# Altium PCB EVB_gate driver.PcbDoc
Units mm, origin at the board's own origin, x right, y up, seen from the top; angles counter-clockwise.
Board outline 29.97 x 33.27 mm, 2 copper layers (TOP Assembly Layer, Bottom Layer), stack 0.142 mm thick; 26 components, 19 nets, 81 pads, 7 vias.
Unrouted connection lines stored in the file: 1.
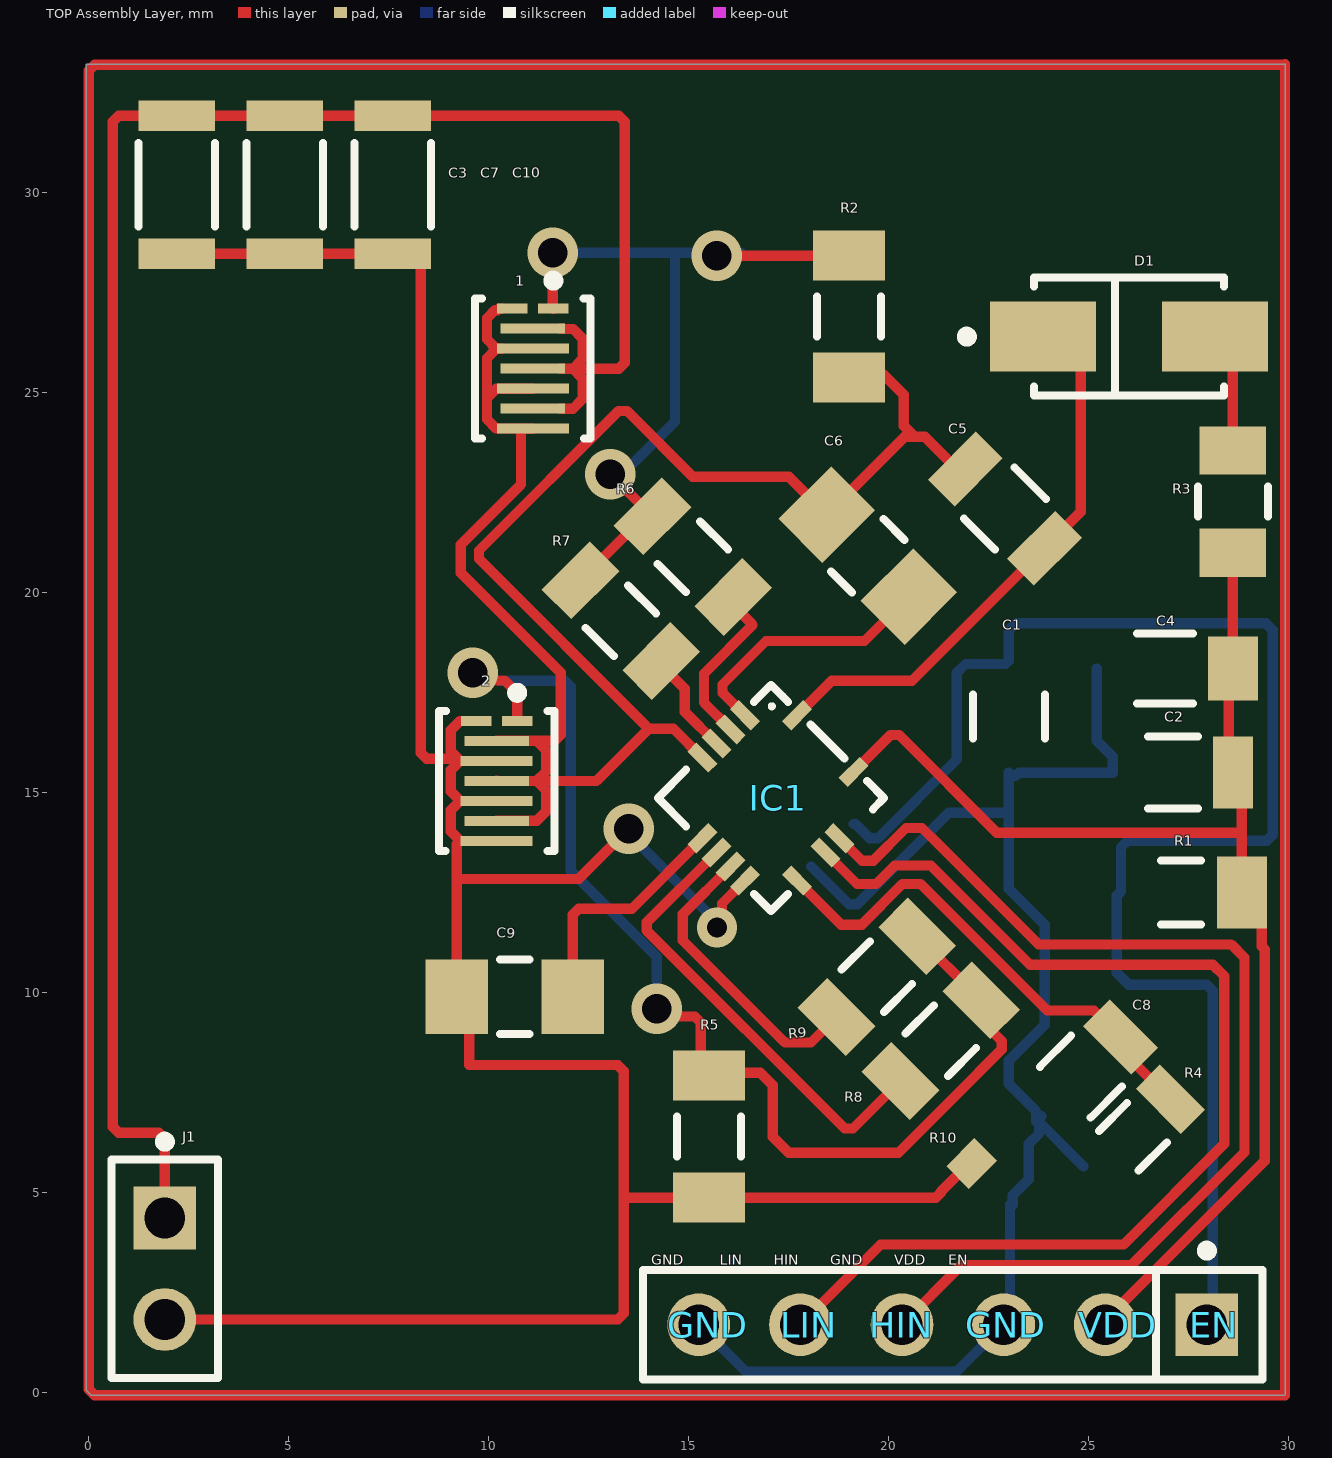
[diagram p0: TOP Assembly Layer view]
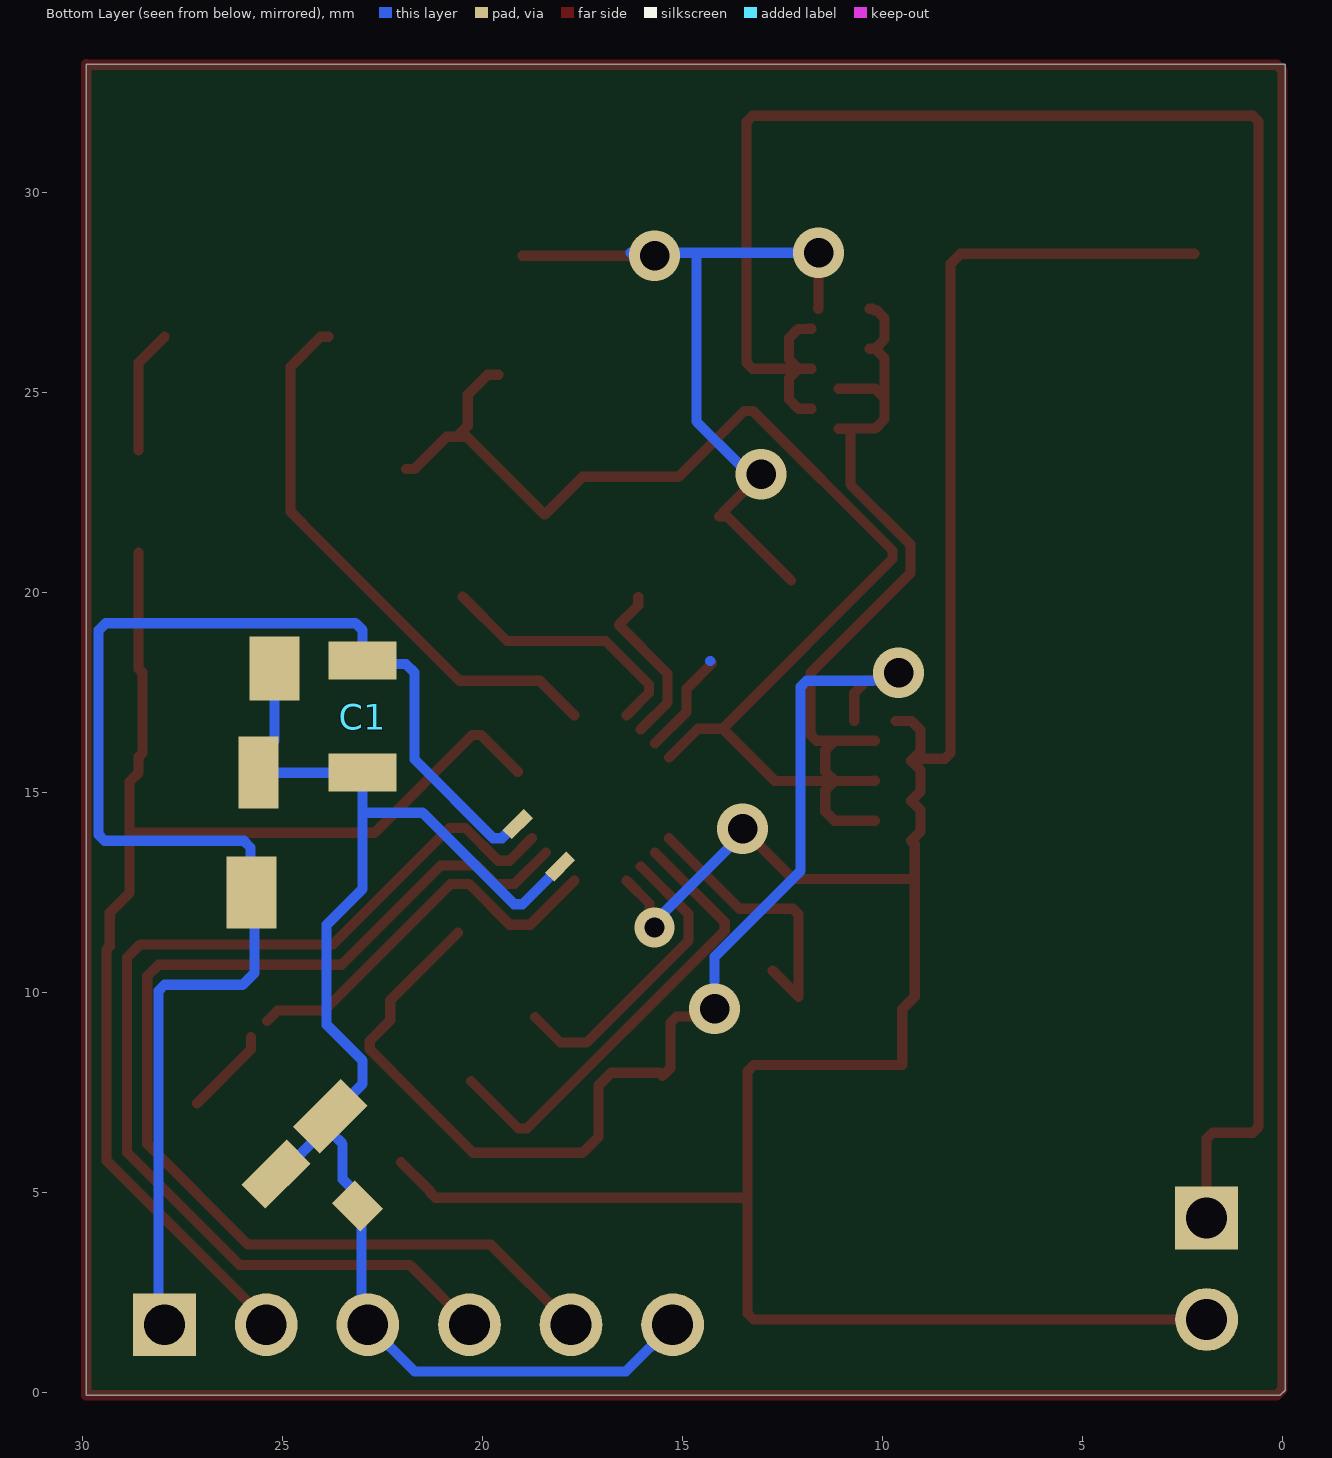
[diagram p1: Bottom Layer view, seen from below]
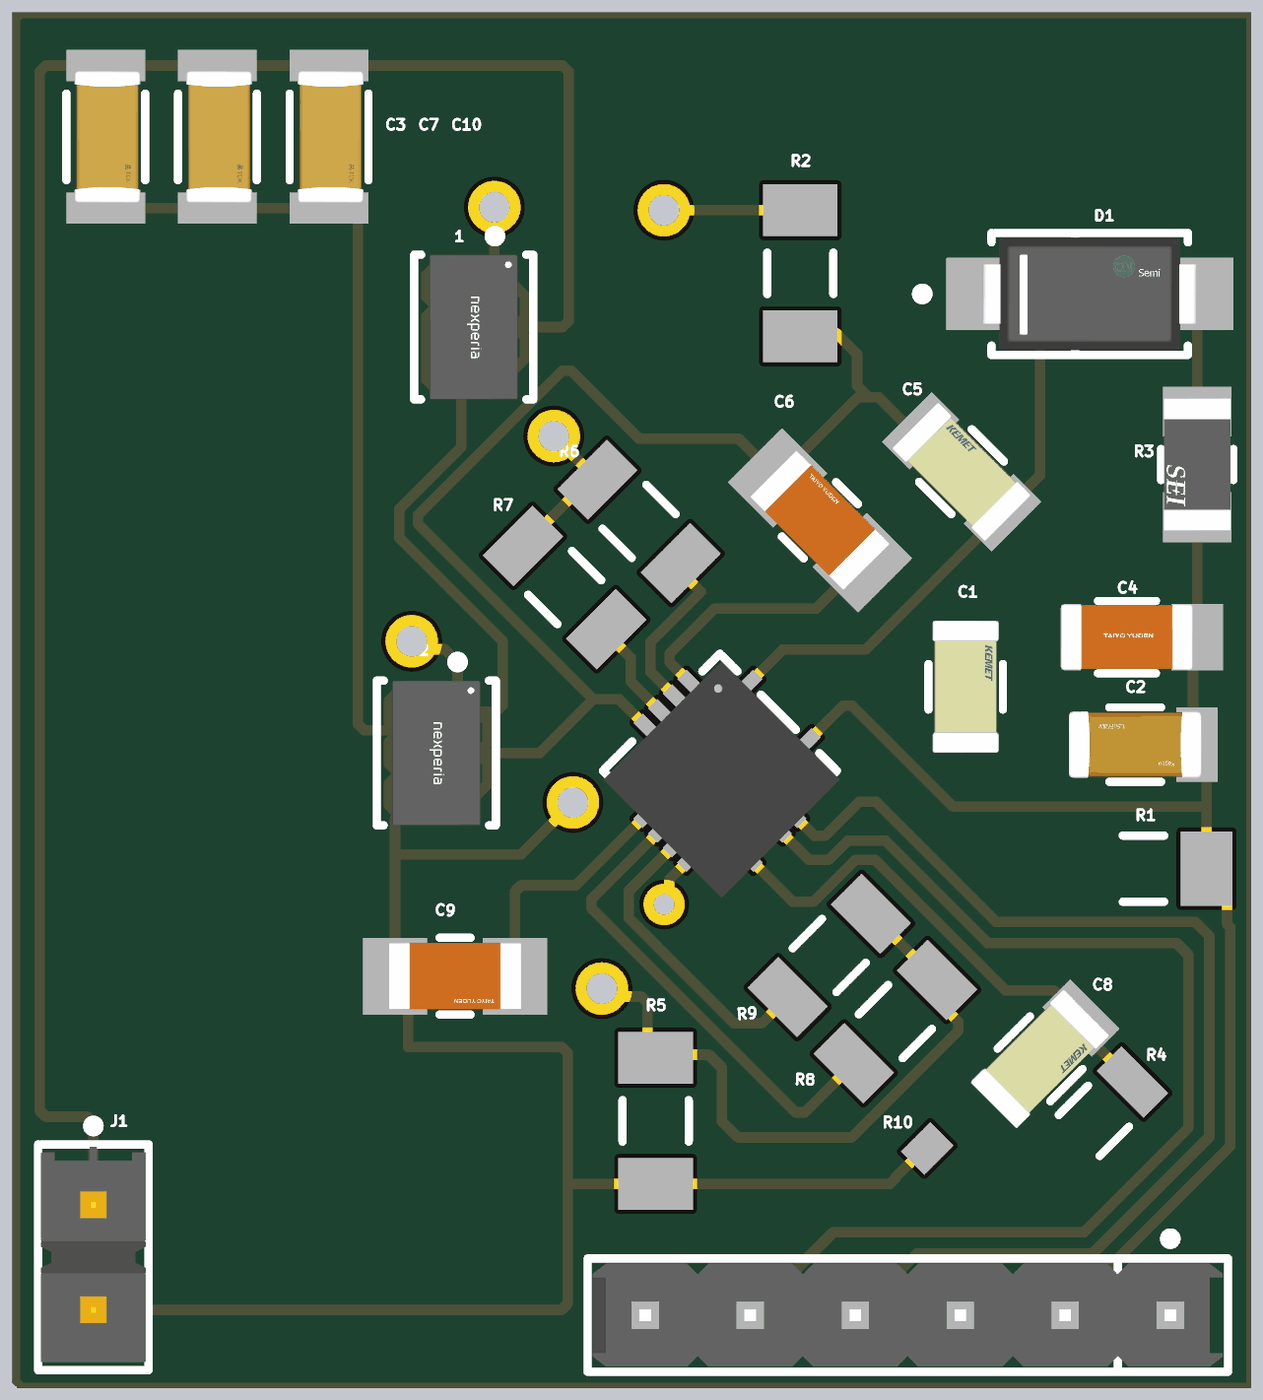
[diagram p2: 3D render of the assembled board from above, using the file's embedded part models]

## Layer stack, top to bottom
Top Solder: solder mask 0.0102, Solder Resist, Dk 3.5
TOP Assembly Layer: signal copper 0.0356
Dielectric 2: prepreg 0.0711, PP-006, Dk 4.29
Bottom Layer: signal copper 0.0356
Bottom Solder: solder mask 0.0102, Solder Resist, Dk 3.5

## Board outline
29.909,-0.064 29.909,33.21 -0.064,33.21 -0.064,0.064 0.064,-0.064

## Design rules (kind name [scope] priority, off if disabled: settings)
Clearance [All] p1: gap=0.21 ignorepadtopadclearanceinfootprint=TRUE
PolygonConnect [All] p1: connectstyle=Relief reliefconductorwidth=0.254 reliefentries=4 polygonreliefangle="90 Angle" airgapwidth=0.254
RoutingVias [All] p1: holewidth=0.74 width=1.27 viastyle="Through Hole" minholewidth=0.74 minwidth=1.27 maxholewidth=0.74 maxwidth=1.27
SolderMaskExpansion [All] p1: expansion=0.102 istentingtop=FALSE
SupplyNets "Schematic Supply Nets" [InNet('GND')] p1: voltage=0.000
UnRoutedNet [All] p1: checkbadconnections=TRUE
Width [All] p1: maxlimit=0.254 minlimit=0.254 preferedwidth=0.254
29 further rules are at their usual default settings.

## Components (designator, comment, footprint, x,y, rotation, side; value= is the part's Value field where it differs from the comment)
1 "GAN3R2-100CBE" FP-WLCSP8-SOT8072-MFG 11.1,25.6 r270 top
2 "GAN3R2-100CBE" FP-WLCSP8-SOT8072-MFG 10.196,15.298 r270 top
C1 "10PF" FP-C1206C-EB-MFG#1 23,16.9 r270 top value="10 pF"
C2 "1uF" FP-CC1206-1_25-MFG 27.1,15.5 r180 top value="1 uF"
C3 "50u" FP-CGA5L-0_3-0_1-IPC_B 4.9,30.2 r270 top
C4 "100nF" FP-1206-L_3_2_0_15-W_1_6-MFG 26.9,18.1 r0 top
C5 "470uF" FP-C1206C-EB-MFG#2 22.9,22.1 r315 top value="0.47 μF"
C6 "1uF" FP-1206-L_3_2_0_15-W_1_6-IPC_A 19.474,20.926 r315 top
C7 "100uF" FP-CGA5L-0_3-0_1-IPC_B 2.2,30.2 r270 top
C8 "0.1uF" FP-C1206C-EB-MFG#3 24.8,7.9 r225 top value="0.10 μF"
C9 "1uF" FP-1206-L_3_2_0_15-W_1_6-IPC_A 10.649,9.9 r180 top
C10 "10u" FP-CGA5L-0_3-0_1-IPC_B 7.6,30.2 r270 top
D1 "ES1J" FP-403AE-MFG 26,26.4 r0 top value=10pF
"GND   LIN   HIN   GND   VDD   EN" "GND        LIN       HIN       GND       VDD     EN" FP-22-28-4060-MFG 21.6,1.7 r180 top (schematic designator Connector)
IC1 "NCP51820" NCP51820 17.054,14.868 r315 top
J1 "TSW-102-07-F-S" FP-TSW-102-07-F-S-MFG 1.9,3.1 r270 top
R1 "10K" RESC3116X65X40ML10T20#1 27.3,12.5 r180 top
R2 "10" RESC3116X65X40ML10T20#2 19,26.9 r90 top
R3 "2.0" FP-RMCF1206-IPC_C 28.6,22.276 r270 top
R4 "60.4" RESC3116X65X40LL10T20 26.1,6.4 r225 top
R5 "10" RESC3116X65X40ML10T20#2 15.5,6.4 r90 top
R6 "10" RESC3116X65X40NL10T20 15.1,20.9 r315 top
R7 "2.0" RESC3116X65X40NL10T20 13.3,19.3 r315 top
R8 "10" RESC3116X65X40NL10T20 21.3,8.8 r225 top
R9 "2.0" RESC3116X65X40NL10T20 19.7,10.4 r225 top
R10 "0" RESC1608X55X25ML10T15 22.6,5.2 r315 top

## Footprints (in the part's own frame and the unit in brackets; to place one, negate y for a bottom-side part, rotate by r counter-clockwise, add the part's x,y. Pads: shape width x height; smd on the part's side, far side on the other; paste and mask are expansions set on the pad)
FP-22-28-4060-MFG [mm]
  rect 1.57x1.57 hole 1.02 paste-2539.97 mask+0: 1(-6.35,0)
  round 1.57 hole 1.02 paste-2539.97 mask+0: 2(-3.81,0) 3(-1.27,0) 4(1.27,0) 5(3.81,0) 6(6.35,0)
  silkscreen extent -7.75,-1.97 7.75,1.37, body extent -7.85,-1.47 7.85,1.47, height 0.25
FP-403AE-MFG [mm]
  rect 2.65x1.75 smd paste+0 mask+0: 1(-2.15,0) 2(2.15,0)
  silkscreen extent -4.17,-1.48 2.37,1.48, body extent -3.57,-1.58 3.57,1.58, height 0.25
FP-1206-L_3_2_0_15-W_1_6-IPC_A [mm]
  rect 1.555x1.858 smd paste+0 mask+0: 1(-1.451,0) 2(1.451,0)
  silkscreen extent -0.37,-0.93 0.37,0.93, body extent -2.73,-1.43 2.73,1.43, height 0.25
FP-1206-L_3_2_0_15-W_1_6-MFG [mm]
  rect 1.25x1.6 smd far side paste+0 mask+0: 1(-1.7,0)
  rect 1.25x1.6 smd paste+0 mask+0: 2(1.7,0)
  silkscreen extent -0.7,-0.87 0.7,0.87, body extent -2.42,-0.97 2.42,0.97, height 0.25
FP-C1206C-EB-MFG#1 [mm]
  rect 0.95x1.7 smd far side paste+0 mask+0: 1(-1.4,0) 2(1.4,0)
  silkscreen extent -0.55,-0.9 0.55,0.9, body extent -2,-1 2,1, height 0.25
FP-C1206C-EB-MFG#2 [mm]
  rect 0.95x1.7 smd paste+0 mask+0: 1(-1.4,0) 2(1.4,0)
  silkscreen extent -0.55,-0.9 0.55,0.9, body extent -2,-1 2,1, height 0.25
FP-C1206C-EB-MFG#3 [mm]
  rect 0.95x1.7 smd paste+0 mask+0: 1(-1.4,0)
  rect 0.95x1.7 smd far side paste+0 mask+0: 2(1.4,0)
  silkscreen extent -0.55,-0.9 0.55,0.9, body extent -2,-1 2,1, height 0.25
FP-CC1206-1_25-MFG [mm]
  rect 1x1.8 smd paste+0 mask+0: 1(-1.5,0)
  rect 1x1.8 smd far side paste+0 mask+0: 2(1.5,0)
  silkscreen extent -0.63,-0.9 0.63,0.9, body extent -2.2,-1.25 2.2,1.25, height 0.25
FP-CGA5L-0_3-0_1-IPC_B [mm]
  rect 0.756x1.906 smd paste+0 mask+0: 1(-1.725,0) 2(1.725,0)
  silkscreen extent -1.05,-0.95 1.05,0.95, body extent -2.35,-1.2 2.35,1.2, height 0.25
FP-RMCF1206-IPC_C [mm]
  rect 1.204x1.658 smd paste+0 mask+0: 1(-1.276,0) 2(1.276,0)
  silkscreen extent -0.37,-0.87 0.37,0.87, body extent -1.98,-0.97 1.98,0.97, height 0.25
FP-TSW-102-07-F-S-MFG [mm]
  rect 1.57x1.57 hole 1.02 paste-2539.97 mask+0: 1(-1.27,0)
  round 1.57 hole 1.02 paste-2539.97 mask+0: 2(1.27,0)
  silkscreen extent -3.3,-1.34 2.73,1.34, body extent -2.83,-1.44 2.83,1.44, height 0.25
FP-WLCSP8-SOT8072-MFG [mm]
  rect 0.25x0.77 smd paste-1000 mask+0: 1(-1.5,0.512) 2(-1.5,-0.513)
  rect 0.25x1.62 smd paste-1000 mask+0: 3(-1,0) 5(0,0) 7(1,0)
  rect 0.25x1.8 smd paste-1000 mask+0: 4(-0.5,0) 6(0.5,0) 8(1.5,0)
  silkscreen extent -2.32,-1.44 1.75,1.44, body extent -1.85,-1.17 1.85,1.17, height 0.25
NCP51820 [mm]
  rect 0.75x0.32 smd: 1(-1.925,1) 2(-1.925,0.5) 3(-1.925,0) 4(-1.925,-0.5) 9(1.925,-1) 11(1.925,0) 12(1.925,0.5)
  rect 0.32x0.75 smd: 5(-0.5,-1.925) 6(0,-1.925) 7(0.5,-1.925) 8(1,-1.925) 14(1,1.925) 15(-1,1.925)
  rect 0.75x0.32 smd far side: 10(1.925,-0.5) 13(1.925,1)
  silkscreen extent -2,-2 2,2, body extent -1.84,-2.14 2.2,1.9, height 0.89
RESC1608X55X25ML10T15 [mm] "Chip Resistor, 2-Leads, Body 1.60x0.80mm, IPC Low Density"
  rect 0.8x1 smd: 1(-0.75,0)
  rect 0.8x1 smd far side: 2(0.75,0)
  body extent -0.85,-0.45 0.85,0.45, height 0.55
RESC3116X65X40LL10T20 [mm] "Chip Resistor, 2-Leads, Body 3.10x1.60mm, IPC High Density"
  rect 0.85x1.6 smd: 1(-1.325,0)
  rect 0.85x1.6 smd far side: 2(1.325,0)
  silkscreen extent -0.5,-0.7 0.5,0.7, body extent -1.6,-0.85 1.6,0.85, height 0.65
RESC3116X65X40ML10T20#1 [mm] "Chip Resistor, 2-Leads, Body 3.10x1.60mm, IPC Low Density"
  rect 1.25x1.8 smd: 1(-1.525,0)
  rect 1.25x1.8 smd far side: 2(1.525,0)
  silkscreen extent -0.5,-0.8 0.5,0.8, body extent -1.6,-0.85 1.6,0.85, height 0.65
RESC3116X65X40ML10T20#2 [mm] "Chip Resistor, 2-Leads, Body 3.10x1.60mm, IPC Low Density"
  rect 1.25x1.8 smd: 1(-1.525,0) 2(1.525,0)
  silkscreen extent -0.5,-0.8 0.5,0.8, body extent -1.6,-0.85 1.6,0.85, height 0.65
RESC3116X65X40NL10T20 [mm] "Chip Resistor, 2-Leads, Body 3.10x1.60mm, IPC Medium Density"
  rect 1.05x1.7 smd: 1(-1.425,0) 2(1.425,0)
  silkscreen extent -0.5,-0.75 0.5,0.75, body extent -1.6,-0.85 1.6,0.85, height 0.65

## Part data
1 2: library part GAN3R2-100CBE_1, "GAN3R2-100CBE                                                                                                                                                                                                                                                     100 V, 3.2 mOhm Gallium Nitride (GaN) FET in a 3.5 mm x 2.13 mm Wafer Level Chip", Continuous Drain Current (ID)=60A, Drain to Source Breakdown Voltage=100V, Drain to Source Resistance=2.4mΩ, Gate to Source Voltage (Vgs)=-4V, Max Junction Temperature (Tj)=150°C, Min Operating Temperature=-40°C, Power Dissipation=394W, Drain to Source Voltage (Vdss)=100V, Height=464µm, Max Operating Temperature=150°C, MPN=GAN3R2-100CBE, NexarPartId=136220986, Number of Channels=1
C1: library part CMP-1037-00647-2, "CAP CER 10PF 50V C0G/NP0 1206", Capacitance="10 pF", Manufacturer=KEMET, Manufacturer Part Number=C1206C100J5GACTU, Package=C1206C-EB, Temperature="-55°C to +150°C", Temperature Characteristic=C0G, Temperature Coefficient=15%, Temperature Range High=+150°C, Temperature Range Low=-55°C, Tolerance=0.05, Voltage Rating="50 V", Automotive=Yes, Automotive Grade="Grade 0", Category=Cap, ComponentLink2Description=Datasheet, ComponentLink2URL=https://content.kemet.com/datasheets/KEM_C1007_X8R_ULTRA_150C_SMD.pdf, Device Class L1="Passive Components", Device Class L2=Capacitors, Device Class L3="Ceramic Capacitors", Digikey Description="CAP CER 10PF 50V C0G/NP0 1206", Height=0.88mm, Ipc Land Pattern Name=CAPC320160X78, Lead Free=Yes, Material=Ceramic, Mouser Description="Multilayer Ceramic Capacitors MLCC - SMD/SMT 50volts 10pF C0G 5%", Octopart=https://octopart.com/c1206c100j5gactu-kemet-87062, RoHS=TRUE
C2: library part CMP-1037-04701-3, "CAP CER 1UF 25V X7R 1206", Capacitance="1 uF", Manufacturer=Yageo, Manufacturer Part Number=CC1206KKX7R8BB105, Package=CC1206-1.25, Temperature="-55°C to +125°C", Temperature Characteristic=X7R, Temperature Coefficient=15%, Temperature Range High=+125°C, Temperature Range Low=-55°C, Tolerance=0.1, Voltage Rating="25 V", Automotive=No, Automotive Grade=NA, Category=Cap, ComponentLink2Description=Datasheet, ComponentLink2URL=http://www.yageo.com/documents/recent/UPY-NP0X7R_HV_1KV-to-3KV_11.pdf, Device Class L1="Passive Components", Device Class L2=Capacitors, Device Class L3="Ceramic Capacitors", Digikey Description="CAP CER 1UF 25V X7R 1206", Footprint Url=http://www.yageo.com/exep/pages/download/literatures/UPY-C_GEN_24.pdf, Height=1.45mm, Lead Free=Yes, Material=Ceramic, Mouser Description="Surface Mount Ceramic Multilayer Capacitor 1uF 10% X7R 25V 1206 Blister T/R", Octopart=https://octopart.com/cc1206kkx7r8bb105-yageo-11543785, RoHS=TRUE
C3 C7 C10: library part CMP-08246-001673-1, "Cap Ceramic 100nF 450V X7T 10% Pad SMD 1206 +125°C Automotive T/R", Capacitance=100nF, Case Code (Imperial)=1206, Case Code (Metric)=3216, Dielectric=X7T, Max Operating Temperature=125°C, Min Operating Temperature=-55°C, Package Quantity=1, Ratings=AEC-Q200, Tolerance=10%, Voltage Rating=450V, Case/Package=1206, Depth=1.6mm, Features="Soft Termination", Height=1.6mm, Lead Free="Lead Free", Length=3.2mm, Mount="Surface Mount", Packaging="Tape and Reel", REACH SVHC="No SVHC", Termination=SMD/SMT, Thickness=0.075inch, Voltage Rating (DC)=450V, Weight=0.000571oz, Width=0.063inch
C4: library part CMP-14477-000033-2, "None", RoHS Compliant=Yes
C5: library part CMP-1037-04557-2, "CAP CER 0.47UF 25V X5R 1206", Capacitance="0.47 μF", Manufacturer=KEMET, Manufacturer Part Number=C1206C474K3PACTU, Package=C1206C-EB, Temperature="-55°C to +150°C", Temperature Characteristic=X5R, Temperature Coefficient=15%, Temperature Range High=+150°C, Temperature Range Low=-55°C, Tolerance=0.1, Voltage Rating="25 V", Automotive=Yes, Automotive Grade="Grade 0", Category=Cap, ComponentLink2Description=Datasheet, ComponentLink2URL=https://content.kemet.com/datasheets/KEM_C1007_X8R_ULTRA_150C_SMD.pdf, Device Class L1="Passive Components", Device Class L2=Capacitors, Device Class L3="Ceramic Capacitors", Digikey Description="CAP CER 0.47UF 25V X5R 1206", Height=0.88mm, Ipc Land Pattern Name=CAPC320160X78, Lead Free=Yes, Material=Ceramic, Mouser Description="Multilayer Ceramic Capacitors MLCC - SMD/SMT 25volts 0.47uF X5R 10%", Octopart=https://octopart.com/c1206c474k3pactu-kemet-16430430, RoHS=TRUE
C6 C9: library part CMP-14477-003409-2, "None", Case Code (Imperial)=1206, Case Code (Metric)=3216, Dielectric=X5R, Max Operating Temperature=85°C, Min Operating Temperature=-55°C, Package Quantity=1, Resistor Type=Ceramic, Tolerance=10%, Voltage=25V, Capacitance=1uF, Case/Package=1206, Construction=Flat, Depth=1.6mm, Halogen Free="Halogen Free", Height=0.85mm, Lead Free="Lead Free", Length=3.2mm, Mount="Surface Mount", Number of Pins=2, Packaging="Tape and Reel", Radiation Hardening=No, RoHS Compliant=Yes, Series=M, Termination=SMD/SMT, Thickness=0.037inch, Voltage Rating=25V, Voltage Rating (DC)=25V, Width=0.063inch
C8: library part CMP-03020-001014-1, "CAP CER 0.1UF 25V 10% X7R 1206", Capacitance="0.10 μF", Manufacturer=KEMET, Manufacturer Part Number=C1206C104K3RACTU, Package=C1206C-EB, Temperature="-55°C to +150°C", Temperature Characteristic=X7R, Temperature Coefficient=15%, Temperature Range High=+150°C, Temperature Range Low=-55°C, Tolerance=0.1, Voltage Rating="25 V", Automotive=Yes, Automotive Grade="Grade 0", Category=Cap, ComponentLink2Description=Datasheet, ComponentLink2URL=https://content.kemet.com/datasheets/KEM_C1007_X8R_ULTRA_150C_SMD.pdf, Device Class L1="Passive Components", Device Class L2=Capacitors, Device Class L3="Ceramic Capacitors", Digikey Description="CAP CER 0.1UF 25V 10% X7R 1206", Height=0.88mm, Ipc Land Pattern Name=CAPC320160X78, Lead Free=Yes, Material=Ceramic, Mouser Description="CAP CER 0.1UF 25V X7R 1206", Octopart=https://octopart.com/c1206c104k3ractu-kemet-9144317, RoHS=TRUE
D1: library part CMP-07163-000025-1, "DIODE GEN PURP 400V 1A SMA", Capacitance=10pF, Forward Current=1A, Manufacturer="ON Semiconductor", Manufacturer Part Number=ES1G, Max Junction Temp=+150°C, Max Repetitive Reverse Voltage=400V, Max Surge Forward Current=30A, Package=403AE, Peak Reverse Current=5uA, Temperature="to +150°C", Automotive=No, Category=Diode, ComponentLink2Description=Datasheet, ComponentLink2URL=https://www.onsemi.com/pub/Collateral/ES1J-D.PDF, Device Class L1="Discrete Semiconductors", Device Class L2=Diodes, Device Class L3="Rectifier Diodes", Digikey Description="DIODE GEN PURP 400V 1A SMA", Footprint Url=https://www.onsemi.com/pub/Collateral/403AE.PDF, Height=2.5mm, Lead Free=Yes, Mouser Description="Rectifiers 1.0 A Ultra Fast Recovery Rect", MPN=ES1J, Octopart=https://octopart.com/es1g-on+semiconductor-84324858, RoHS=TRUE, Standoff Height=0.05mm, Temperature Range High=+150°C
"GND   LIN   HIN   GND   VDD   EN": library part CMP-04776-000763-1, "CONN HEADER VERT 6POS 2.54MM", Color=Black, Contact Resistance=20mR, Current Rating=4A, Max Operating Temperature=75°C, Max Voltage Rating (AC)=250V, Max Voltage Rating (DC)=250.25kV, Min Operating Temperature=0°C, MPN=22-28-4060, Package Quantity=1, Connector Type="Male Pin", Contact Material=Brass, Contact Mating Length=0.24inch, Contact Plating=Tin, Contact Type="Male Pin", Depth=2.49mm, Gender=Male, Housing Color=Black, Housing Material=Thermoplastic, Length=15.24mm, Mount="Through Hole", Number Of Contacts=6, Number of Positions=6, Number Of Rows=1, Orientation=Straight, Packaging=Bulk, Pitch=2.54mm, RoHS Compliant=Yes, Series="KK® 42375", Termination=Solder, Voltage Rating=250V
IC1: "Integrated Circuit", Manufacturer_Name=onsemi, Mouser Part Number=N/A, Datasheet Link=https://www.onsemi.com/download/data-sheet/pdf/ncp51820-d.pdf, Height=0.9mm, Manufacturer_Part_Number=NCP51820, Mouser Price/Stock=https://www.mouser.co.uk/ProductDetail/onsemi/NCP51820?qs=vEM7xhTegWhaPMdkL3AwCA%3D%3D, MPN=NCP51820
J1: library part CMP-02766-001458-1, "CONN HEADER VERT 2POS 2.54MM", Color=Black, Flammability Rating="UL94 V-0", Max Current Rating=7.6A, Max Operating Temperature=125°C, Max Voltage Rating (AC)=550V, Min Operating Temperature=-55°C, Package Quantity=1, Connector Type=Header, Contact Finish - Mating=GOLD, Contact Material=Bronze, Contact Mating Length=0.23inch, Contact Plating=Gold, Contact Shape=Square, Contact Type="Male Pin", Depth=2.54mm, Fastening Type=Pull, Gender=Male, Housing Color=Black, Housing Material=Polyester, Insulation Color=Black, Insulation Material=PBT, Length=5.08mm, Mount="Through Hole", Number Of Contacts=2, Number of Positions=2, Number Of Rows=1, Orientation=Straight, Packaging=Bulk, Pitch=2.54mm, Radiation Hardening=No, REACH SVHC="No SVHC", RoHS Compliant=Yes, Series=TSW, Termination=Solder
R1 R2 R5: library part CMP-1014-00623-2, "Chip Resistor, 10 KOhm, +/- 1%, 0.25 W, -55 to 155 degC, 1206 (3216 Metric), RoHS, Tape and Reel", Case Code (Imperial)=1206, Case Code (Metric)=3216, Manufacturer=Yageo, Max Operating Temperature=155degC, Min Operating Temperature=-55degC, Package Description="2-Pin Surface Mount Device, Body 3.1 x 1.6 mm", Package Quantity=5000, Package Reference=1206.0, Power Rating=250mW, Resistance=10KOhm, Temperature Coefficient=100ppm/degreesC, Tolerance=1%, Voltage Rating=200V, Case/Package=1206, Composition=ThickFilm, Datasheet URL=http://www.yageo.com/NewPortal/yageodocoutput?fileName=/pdf/R-Chip/PYu-RC_Group_51_RoHS_L_5.pdf, Datasheet Version="Rev. 5, 10/2016", Depth=1.6mm, Height=0.55mm, Lead Free=LeadFree, Length=3.1mm, Manufacturer URL=http://www.yageo.com/, Military Standard=Not, Packaging=TapeandReel, REACH SVHC=Unknown, RoHSCompliant=true, Termination=SMD/SMT, Width=1.6mm
R3: library part CMP-26527-002749-1, "RES 2 OHM 1% 1/4W 1206", Case Code (Imperial)=1206, Case Code (Metric)=3216, Max Operating Temperature=155°C, Max Power Dissipation=250mW, Min Operating Temperature=-55°C, Package Quantity=5000, Resistance=2R, Resistor Type="Thick Film", Temperature Coefficient=200ppm/°C, Tolerance=1%, Case/Package=1206, Contact Plating=Tin, Features="Automotive AEC-Q200", Height=0.028inch, Lead Free="Lead Free", Length=0.126inch, Mount="Surface Mount", Number of Terminations=2, Packaging="Tape and Reel", Radiation Hardening=No, RoHS Compliant=Yes, Series=RMCF, Width=0.063inch
R4: library part CMP-2003-03498-1, Manufacturer=Yageo, Part Number=RC1206FR-1360R4L
R6 R8: library part CMP-2003-04941-1, Manufacturer=Yageo, Part Number=RC1206FR-1310RL
R7 R9: library part CMP-2003-03966-1, Manufacturer=Yageo, Part Number=RC1206JR-072RL
R10: library part CMP-2100-03667-1, "Chip Resistor, 0 Ohm, +/- 5%, 0.1 W, -55 to 155 degC, 0603 (1608 Metric), RoHS, Tape and Reel", Case Code (Imperial)=0603, Case Code (Metric)=1608, Manufacturer=Yageo, Max Operating Temperature=155degC, Min Operating Temperature=-55degC, MPN=RC0603JR−070RL, Package Description="2-Pin Surface Mount Device, Body 1.6 x 0.8 mm", Package Quantity=5000, Power Rating=100mW, Resistance=0mOhm, Temperature Coefficient=200ppm/degreesC, Tolerance=5%, Voltage Rating=50V, Case/Package=0603, Composition=ThickFilm, Contact Plating=Tin, Datasheet URL=http://www.yageo.com/NewPortal/yageodocoutput?fileName=/pdf/R-Chip/PYu-RC_Group_51_RoHS_L_5.pdf, Datasheet Version="Rev. 5, 10/2016", Depth=0.8mm, Height=0.45mm, Lead Free=LeadFree, Length=1.6mm, Manufacturer URL=http://www.yageo.com/, Military Standard=Not, Number of Pins=2, Package Reference=0603, Packaging=TapeandReel, Radiation Hardening=No, REACH SVHC=NoSVHC, RoHSCompliant=true, Termination=SMD/SMT, Voltage Rating (DC)=50V, Width=0.8mm

## Via types
v1: diameter 1.27, hole 0.74, TOP Assembly Layer to Bottom Layer, 6 vias
v2: diameter 1, hole 0.5, TOP Assembly Layer to Bottom Layer, 1 vias

## Nets (pads, with @x,y where several pads share a name; then routed paths per layer and width w, separated by ;. In a path a pad name is that pad's centre, name@x,y a point inside that pad or via, vN(x,y) a via of type N, cw(c..) or ccw(c..) an arc to the next point about the centre after c; other vN are vias at no path point)
GND: "GND   LIN   HIN   GND   VDD   EN.3" "GND   LIN   HIN   GND   VDD   EN.6" C1.2 C2.2 C4.1 C8.2 IC1.10 R4.2 R10.2 | length 37
  Bottom Layer w0.254: 15.25,1.7 16.416,0.534 21.704,0.534 22.87,1.7 23.029,1.859 R10.2@23.029,4.7 ; IC1.10 19.002,12.213 19.213,12.213 21.5,14.5 23,14.5 ; C1.2 23,14.5 ; R10.2@23.1,4.7 23.1,4.936 23.5,5.336 23.5,6.22 23.754,6.474 23.754,6.72 23.687,6.787 C8.2 ; C1.2@23.17,15.418 23.252,15.5 C2.2 25.6,15.9 25.2,16.3 C4.1 ; C8.2@23.675,6.799 23.675,7.045 23,7.72 23,8.3 23.9,9.2 23.9,11.7 23,12.6 23,14.5 ; C8.2@23.727,6.799 R4.2@24.863,5.663
Net1_1: 1.1 R2.2 R6.1 R7.1 | length 19.6
  TOP Assembly Layer w0.254: v1(11.6,28.5) 11.6,27.102 11.602,27.1 1.1 ; R7.1 13.892,21.908 R6.1 ; v1(13.037,22.963) R6.1@13.992,22.008 ; v1(15.7,28.425) R2.2
  Bottom Layer w0.254: v1(11.6,28.5) 14.651,28.5 ; v1(13.037,22.963) 13.312,22.963 13.55,23.2 13.575,23.2 14.651,24.277 14.651,28.5 ; v1@16.3,28.5 14.651,28.5
Net1_2: 1.2 1.4 1.6 1.8 2.3 2.5 2.7 C5.1 C6.1 IC1.4 R2.1 | length 50.3
  TOP Assembly Layer w0.254: 10.15,26.062 9.953,25.865 9.953,24.865 ; 10.15,26.138 9.953,26.335 9.953,26.865 10.15,27.062 10.216,27.062 10.252,27.098 1.2@10.329,27.098 ; 10.151,26.138 10.188,26.101 1.4@10.327,26.101 ; 2.7 10.198,14.3 11.2,14.3 11.433,14.533 11.433,15.063 11.2,15.296 ; 2.5 10.198,15.296 11.2,15.296 ; 2.3 11.2,16.298 11.651,16.298 11.8,16.447 11.8,18 9.3,20.5 9.3,21.2 10.802,22.702 10.802,24.098 10.804,24.1 1.8 ; 1.8@10.802,24.102 10.186,24.102 9.953,24.335 9.953,24.865 ; 1.6 11.098,25.098 10.186,25.098 9.953,24.865 ; 11.2,16.296 11.433,16.063 11.433,15.533 ; 11.435,15.531 11.2,15.296 ; IC1.4 14.615,16.6 14,16.6 ; R2.1@19.6,25.45 19.875,25.45 20.373,24.952 20.373,24.174 20.647,23.9 ; C5.1 21.71,23.09 20.9,23.9 20.647,23.9 ; 11.2,15.296 12.696,15.296 14,16.6 ; 14,16.6 9.755,20.845 9.755,21.055 13.245,24.545 13.455,24.545 15.1,22.9 17.5,22.9 C6.1 20.395,23.9 20.647,23.9
Net1_3: 1.3 1.5 1.7 C3.1 C7.1 C10.1 J1.1 | length 52.2
  TOP Assembly Layer w0.254: J1.1 1.9,6.351 1.751,6.5 0.749,6.5 0.6,6.649 0.6,31.776 0.749,31.925 C7.1 C3.1 C10.1 13.251,31.925 13.4,31.776 13.4,25.747 13.251,25.598 12.106,25.598 1.5@11.783,25.598 ; 1.7@11.783,24.601 12.106,24.601 12.339,24.834 12.339,25.363 12.106,25.597 ; 1.3@11.783,26.598 11.86,26.598 11.862,26.597 12.106,26.597 12.339,26.363 12.339,25.834 12.106,25.601
Net2_1: 2.1 R5.2 R8.1 R9.1 | length 30
  TOP Assembly Layer w0.254: v1(9.6,18) 9.794,17.806 10.396,17.806 10.709,17.492 2.1 ; v1(14.2,9.6) 14.394,9.406 15.151,9.406 15.3,9.257 15.3,8.125 R5.2 15.575,8 16.788,8 17.1,7.688 17.1,6.4 17.5,6 20.241,6 21.646,7.405 22.824,8.583 22.824,8.793 22.308,9.309 R8.1 R9.1@20.615,11.5
  Bottom Layer w0.254: v1(9.6,18) 9.794,17.806 10.251,17.806 10.257,17.8 11.901,17.8 12.05,17.651 12.05,13.05 14.2,10.9 v1(14.2,9.6)
Net2_2: 2.2 2.4 2.6 2.8 C3.2 C7.2 C9.2 C10.2 IC1.8 J1.2 R5.1 R10.1 | length 69.4
  TOP Assembly Layer w0.254: J1.2 13.226,1.83 13.375,1.979 13.375,4.875 ; C7.2 C3.2 8.049,28.475 8.3,28.224 8.3,15.997 8.449,15.849 9.234,15.849 ; 9.283,14.796 9.049,14.563 9.049,14.033 9.283,13.8 9.197,13.714 9.197,12.846 ; 9.283,14.8 9.049,15.033 9.049,15.563 9.283,15.796 ; 9.283,15.8 9.234,15.849 ; 2.2@9.682,16.796 9.283,16.796 9.049,16.563 9.049,16.033 9.234,15.849 ; v1(13.5,14.1) 12.246,12.846 9.197,12.846 ; v2(15.706,11.634) 15.829,11.757 15.829,12.229 IC1.8 ; R10.1@22.039,5.761 21.3,5.021 21.3,5 21.175,4.875 R5.1 13.375,4.875 ; 9.197,12.846 C9.2 9.511,9.586 9.511,8.189 13.226,8.189 13.375,8.04 13.375,4.875
  Bottom Layer w0.254: v1(13.5,14.1) 13.5,13.97 15.706,11.764 v2(15.706,11.634)
NetC1_1: "GND   LIN   HIN   GND   VDD   EN.1" C1.1 IC1.13 R1.2 | length 37.9
  Bottom Layer w0.254: IC1.13 19.169,14.214 19.522,13.861 19.733,13.861 21.7,15.828 21.7,18 21.918,18.218 22.918,18.218 C1.1 23,19.062 23.175,19.237 29.425,19.237 29.6,19.062 29.6,13.949 29.451,13.8 25.97,13.8 25.802,13.632 25.802,12.527 25.7,12.425 25.7,10.5 26,10.2 27.951,10.2 28.1,10.051 28.1,1.85 27.95,1.7
NetC2_1: "GND   LIN   HIN   GND   VDD   EN.2" C2.1 C4.2 IC1.14 R1.1 R3.2 | length 32.5
  TOP Assembly Layer w0.254: IC1.14 20.045,16.445 20.255,16.445 22.7,14 28.825,14 ; 25.41,1.7 25.41,1.81 29.4,5.8 29.4,11.083 29.323,11.161 29.323,12.002 R1.1 28.825,14 ; R3.2 C4.2 28.5,18 28.5,16 28.6,15.9 C2.1 C2.1@28.815,15.285 ; C2.1@28.825,15.275 28.825,14
NetC5_2: C5.2 D1.1 IC1.15 | length 14.1
  TOP Assembly Layer w0.254: IC1.15 18.572,17.8 20.58,17.8 C5.2 24.155,21.375 24.8,22.02 24.8,25.652 24.052,26.4 D1.1
NetC6_2: C6.2 IC1.1 | length 6.6
  TOP Assembly Layer w0.254: IC1.1 15.842,17.495 15.842,17.705 16.928,18.791 19.391,18.791 C6.2
NetC8_1: C8.1 IC1.9 R4.1 | length 12.2
  TOP Assembly Layer w0.254: IC1.9 18.808,11.7 19.321,11.7 20.338,12.717 20.795,12.717 23.957,9.555 25.125,9.555 C8.1@25.39,9.29 ; C8.1 25.79,8.584 R4.1@27.137,7.237
NetC9_1: C9.1 IC1.5 | length 7
  TOP Assembly Layer w0.254: C9.1@12.751,10.551 C9.1 12.1,11.951 12.249,12.1 13.579,12.1 IC1.5
NetConnector_4: "GND   LIN   HIN   GND   VDD   EN.4" IC1.12 | length 27.2
  TOP Assembly Layer w0.254: IC1.12 19.329,13.3 19.609,13.3 20.428,14.119 20.83,14.119 21.257,13.692 23.741,11.208 28.557,11.208 28.892,10.873 28.892,6.011 26.076,3.195 21.825,3.195 20.33,1.7
NetConnector_5: "GND   LIN   HIN   GND   VDD   EN.5" IC1.11 | length 28.3
  TOP Assembly Layer w0.254: 17.79,1.7 19.793,3.703 25.866,3.703 28.384,6.221 28.384,10.416 28.1,10.7 23.53,10.7 21.049,13.181 20.146,13.181 19.682,12.716 19.206,12.716 IC1.11
NetD1_2: D1.2 R3.1 | length 3.1
  TOP Assembly Layer w0.254: D1.2@27.95,26.4 28.6,25.75 R3.1
NetIC1_2: IC1.2 R6.2 | length 4.3
  TOP Assembly Layer w0.254: IC1.2 15.378,17.252 15.378,17.978 16.595,19.195 16.108,19.682 R6.2
NetIC1_3: IC1.3 R7.2 | length 2.6
  TOP Assembly Layer w0.254: R7.2@14.265,18.235 14.9,17.6 14.9,17.022 IC1.3
NetIC1_6: IC1.6 R8.2 | length 11.6
  TOP Assembly Layer w0.254: IC1.6 13.948,11.762 13.948,11.552 18.895,6.605 19.105,6.605 R8.2
NetIC1_7: IC1.7 R9.2 | length 7.5
  TOP Assembly Layer w0.254: IC1.7 16.042,13.154 14.85,11.961 14.85,11.307 17.401,8.755 18.055,8.755 R9.2
copper on no net: | length 126.2
  TOP Assembly Layer w0.254: 29.9,33.2 0.149,33.2 0,33.051 0,0.085 0.149,-0.064 29.909,-0.064 29.909,33.21

## Polygon pours and split planes (outlines as drawn)
no net on Top Designator (solid): 5.75,17.75